# EAGLE board PNPHeadBoard (EAGLE 8.0.2)
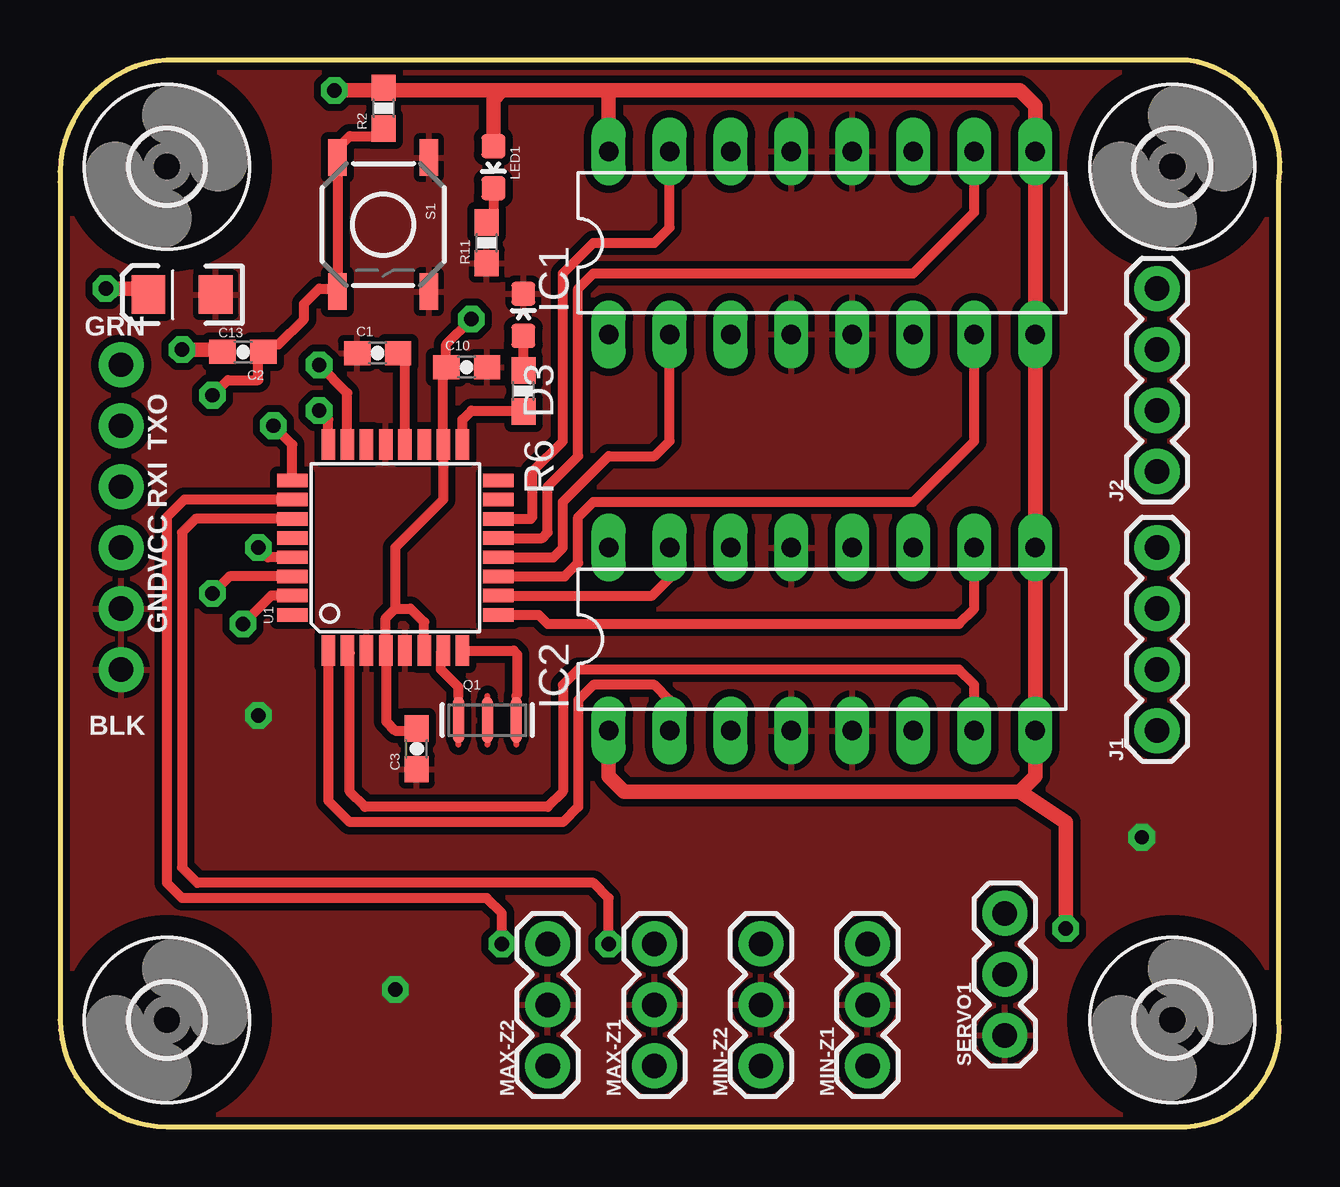
[diagram p0: board, top side]
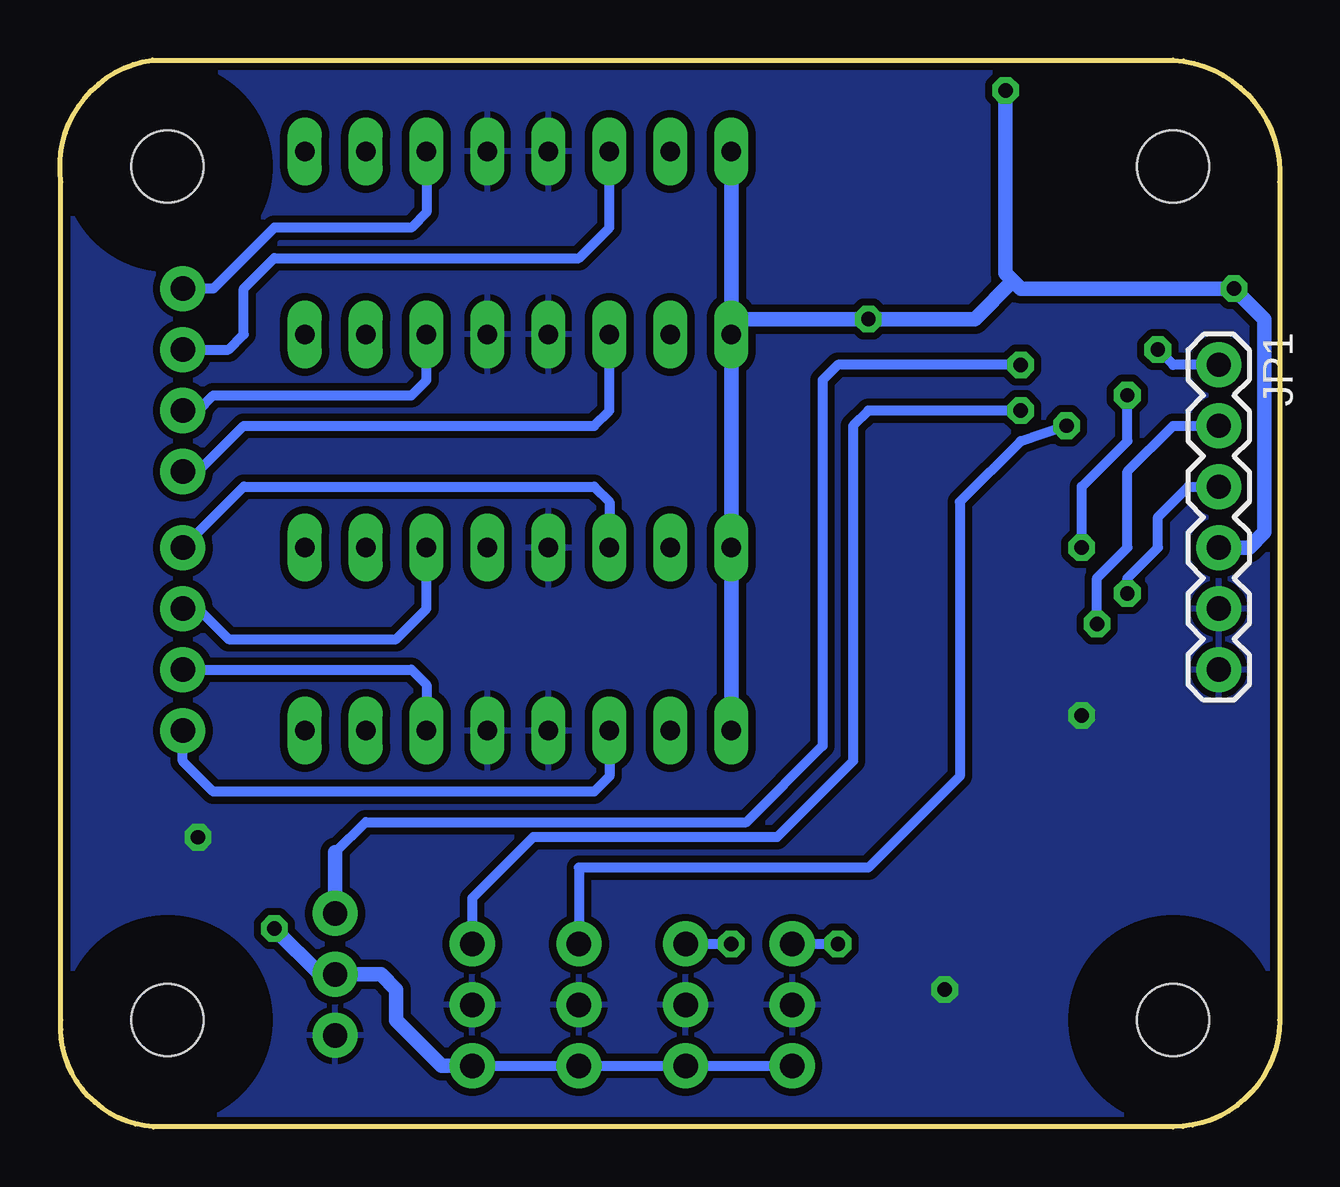
[diagram p1: board, bottom side, seen from below]

Size 50.85 x 44.45 mm. Coordinates in mm from the lower left corner, seen from the top.
Outline: 0.01,39.37 0.01,4.45 arc90 4.45,0 46.95,0 arc90 50.81,4.45 50.81,39.37 arc90 47,44.45 4.45,44.45 arc90 0.01,39.37
Copper layers (1*16): Top 0.035mm / dielectric 1.5mm / Bottom 0.035mm
Design rules "SparkFun-2-layer *": minimum track width 7mil, minimum drill 15mil, track to track 8mil, track to pad 8mil, pad to pad 8mil, via to via 8mil, smd to smd 8mil, copper to edge 8mil, drill to drill 8mil, minimum pad ring 12mil, minimum via ring 10mil, stop-mask expansion 4mil, vias tented up to drill 20mil, thermal gap 10mil
Net classes: 0 default: width 0.203 mm; 1 vcc: width 0.254 mm

## Footprints (pad centres in the part's own frame; a part is rotated, then mirrored left to right if it is on the bottom)
0603-CAP = smd 1.1 x 1: 1 -0.85,0; 2 0.85,0
EIA3216 = smd 1.4 x 1.6: A 1.4,0; C -1.4,0
0603-LED-ALT1 = smd 1 x 1: A 0,-0.877; C 0,0.877
DIL16 = drill 0.813 long: 1 -8.89,-3.81; 2 -6.35,-3.81; 3 -3.81,-3.81; 4 -1.27,-3.81; 5 1.27,-3.81; 6 3.81,-3.81; 7 6.35,-3.81; 8 8.89,-3.81; 9 8.89,3.81; 10 6.35,3.81; 11 3.81,3.81; 12 1.27,3.81; 13 -1.27,3.81; 14 -3.81,3.81; 15 -6.35,3.81; 16 -8.89,3.81
1X04 = drill 1.016 pad 1.88: 1 0,0; 2 2.54,0; 3 5.08,0; 4 7.62,0
1X06 = drill 1.016 pad 1.88: 1 0,0; 2 2.54,0; 3 5.08,0; 4 7.62,0; 5 10.16,0; 6 12.7,0
1X03 = drill 1.016 pad 1.88: 1 0,0; 2 2.54,0; 3 5.08,0
RESONATOR-SMD-1:1 = smd 0.45 x 1.905: 1 -1.2,0; 2 0,0; 3 1.2,0
0603-RES = smd 1.1 x 1: 1 -0.85,0; 2 0.85,0
TACTILE-SWITCH-SMD-ALT01 = smd 1.524 x 0.762: 1 -2.794,1.905; 2 2.794,1.905; 3 -2.794,-1.905; 4 2.794,-1.905
TQFP32-08 = smd 1.27 x 0.559: 1 -4.293,2.8; 2 -4.293,2; 3 -4.293,1.2; 4 -4.293,0.4; 5 -4.293,-0.4; 6 -4.293,-1.2; 7 -4.293,-2; 8 -4.293,-2.8; 17 4.293,-2.8; 18 4.293,-2; 19 4.293,-1.2; 20 4.293,-0.4; 21 4.293,0.4; 22 4.293,1.2; 23 4.293,2; 24 4.293,2.8 | smd 0.559 x 1.27: 9 -2.8,-4.293; 10 -2,-4.293; 11 -1.2,-4.293; 12 -0.4,-4.293; 13 0.4,-4.293; 14 1.2,-4.293; 15 2,-4.293; 16 2.8,-4.293; 25 2.8,4.293; 26 2,4.293; 27 1.2,4.293; 28 0.4,4.293; 29 -0.4,4.293; 30 -1.2,4.293; 31 -2,4.293; 32 -2.8,4.293
3,0 = hole 3: 0,0

## Placement (x,y rotation side)
C1  0.1uF  [0603-CAP]  13.24,32.23 0 top
C2  0.1uF  [0603-CAP]  7.63,32.28 180 top
C3  0.1uF  [0603-CAP]  14.87,15.75 90 top
C10  0.1uF  [0603-CAP]  16.95,31.65 0 top
C13  10uF  [EIA3216]  5.09,34.67 180 top
D3  Green  [0603-LED-ALT1]  19.31,33.83 0 top
IC1  L293D  [DIL16]  31.76,36.83 0 top
IC2  L293D  [DIL16]  31.76,20.32 0 top
J1  [1X04]  45.73,16.51 90 top
J2  [1X04]  45.73,27.3 90 top
JP1  FTDI Basic  [1X06]  2.55,31.75 270 bottom
LED1  Red  [0603-LED-ALT1]  18.07,39.98 180 top
MAX-Z1  [1X03]  24.77,2.54 90 top
MAX-Z2  [1X03]  20.33,2.54 90 top
MIN-Z1  [1X03]  33.66,2.54 90 top
MIN-Z2  [1X03]  29.22,2.54 90 top
Q1  8/16/20MHz  [RESONATOR-SMD-1:1]  17.81,16.94 0 top
R2  10K  [0603-RES]  13.5,42.44 90 top
R6  330  [0603-RES]  19.31,30.66 90 top
R11  10K  [0603-RES]  17.79,36.83 90 top
S1  Reset  [TACTILE-SWITCH-SMD-ALT01]  13.47,37.59 270 top
SERVO1  [1X03]  39.38,3.81 90 top
U1  ATMEGA328  [TQFP32-08]  13.98,24.13 90 top
U$1  [3,0]  46.36,40.01 0 top
U$2  [3,0]  4.45,40.01 0 top
U$4  [3,0]  4.45,4.45 0 top
U$5  [3,0]  46.36,4.45 0 top

## Library data of the parts
C1-C3 C10 C13 JP1 R2 R6 R11 U1 = SparkFun
D3 LED1 Q1 S1 = Testing
IC1 IC2 = st-microelectronics; MPN: L293D; OC_FARNELL: 9589619; OC_NEWARK: 56P8249
J1 J2 = SparkFun-Connectors; PROD_ID: CONN-09696
MAX-Z1 MAX-Z2 MIN-Z1 MIN-Z2 SERVO1 = SparkFun-Connectors
U$1 U$2 U$4 U$5 = holes

## Nets
A0: SERVO1.3 U1.23
A1: MIN-Z1.3 U1.24
A2: MIN-Z2.3 U1.25
A3: MAX-Z2.3 U1.26
A4: MAX-Z1.3 U1.27
A5: U1.28
A6: U1.19
A7: U1.22
AREF: C1.2 U1.20
D2: U1.32
D3: IC2.2 U1.1
D4: IC2.7 U1.2
D5: IC2.10 U1.9
D6: IC2.15 U1.10
D7: IC1.7 U1.11
D8: IC1.2 U1.12
D9: IC1.10 U1.13
D10: IC1.15 U1.14
DTR: C2.2 JP1.1
GND [vcc]: C1.1 C3.1 C10.2 C13.C D3.C IC1.4 IC1.5 IC1.12 IC1.13 IC2.4 IC2.5 IC2.13 JP1.5 JP1.6 MAX-Z1.2 MAX-Z2.2 MIN-Z1.2 MIN-Z2.2 Q1.2 R11.1 S1.1 S1.2 SERVO1.1 U1.3 U1.5 U1.21
MISO: U1.16
MOSI: U1.15
N$1: Q1.3 U1.8
N$2: Q1.1 U1.7
N$3: IC2.6 J1.2
N$4: LED1.C R11.2
N$5: IC2.11 J1.3
N$6: IC2.14 J1.4
N$7: D3.A R6.2
N$8: IC1.14 J2.3
N$9: IC2.3 J1.1
N$10: IC1.11 J2.4
N$11: IC1.6 J2.2
N$12: IC1.3 J2.1
N$21: IC2.12
RESET: C2.1 R2.1 S1.3 S1.4 U1.29
RXI: JP1.3 U1.30
SCK: R6.1 U1.17
TXO: JP1.2 U1.31
VCC: C3.2 C10.1 C13.A IC1.1 IC1.8 IC1.9 IC1.16 IC2.1 IC2.8 IC2.9 IC2.16 JP1.4 LED1.A MAX-Z1.1 MAX-Z2.1 MIN-Z1.1 MIN-Z2.1 R2.2 SERVO1.2 U1.4 U1.6 U1.18

## Tracks (layer width: path | path; a pad name or v marks a point on that pad's centre or on a via)
A0  (via drill 0.6)
  Top 0.406: U1.23 11.98,30.57 v10.8,31.75
  Bottom 0.406: v10.8,31.75 18.42,31.75 19.06,31.11 19.06,15.88 22.23,12.7 38.11,12.7 39.38,11.43
  Bottom 0.61: 39.38,11.43 SERVO1.3
A1  (via drill 0.6)
  Top 0.406: U1.24 11.18,29.47 v10.8,29.84
  Bottom 0.406: v10.8,29.84 17.15,29.84 17.79,29.21 17.79,15.24 20.96,12.06 31.12,12.06 33.66,9.53 MIN-Z1.3
A2  (via drill 0.6)
  Top 0.406: U1.25 9.69,28.42 v8.9,29.21
  Bottom 0.406: v8.9,29.21 10.8,28.57 13.34,26.04 13.34,14.61 17.15,10.79 29.22,10.79 MIN-Z2.3
A3  (via drill 0.6)
  Top 0.406: U1.26 5.18,26.13 4.45,25.4 4.45,10.16 5.09,9.53 17.79,9.53 18.42,8.89 v18.42,7.62
  Bottom 0.406: MAX-Z2.3 v18.42,7.62
A4  (via drill 0.6)
  Top 0.406: U1.27 5.65,25.33 5.09,24.77 5.09,10.79 5.72,10.16 22.23,10.16 22.87,9.53 v22.87,7.62
  Bottom 0.406: MAX-Z1.3 v22.87,7.62
AREF
  Top 0.406: U1.20 14.38,31.95 C1.2
D3
  Top 0.406: IC2.2 25.41,17.78 24.77,18.41 22.23,18.41 21.6,17.78 21.6,13.34 20.96,12.7 12.07,12.7 11.18,13.6 U1.1
D4
  Top 0.406: IC2.7 38.11,18.41 37.47,19.05 21.6,19.05 20.96,18.41 20.96,13.97 20.33,13.34 12.71,13.34 12.07,13.97 12.07,19.74 U1.2
D5
  Top 0.406: U1.9 19.95,21.33 20.33,20.95 37.47,20.95 38.11,21.59 IC2.10
D6
  Top 0.406: IC2.15 25.41,22.86 24.68,22.13 U1.10
D7
  Top 0.406: U1.11 21.03,22.93 21.6,23.5 21.6,25.4 22.23,26.04 35.57,26.04 38.11,28.57 IC1.7
D8
  Top 0.406: U1.12 20.56,23.73 20.96,24.13 20.96,26.04 22.87,27.94 24.77,27.94 25.41,28.57 IC1.2
D9
  Top 0.406: U1.13 20.09,24.53 20.33,24.77 20.33,26.67 21.6,27.94 21.6,34.92 22.23,35.56 35.57,35.56 38.11,38.1 IC1.10
D10
  Top 0.406: U1.14 19.62,25.33 19.69,25.4 19.69,27.3 20.96,28.57 20.96,35.56 22.23,36.83 24.77,36.83 25.41,37.47 IC1.15
DTR  (via drill 0.6)
  Top 0.61: v5.09,32.38 6.68,32.38 C2.2
  Bottom 0.406: JP1.1 4.45,31.75 v5.09,32.38
GND  (via drill 0.6)
  other vias: 8.26,17.14 45.09,12.06 13.98,5.71
  pour Top (isolate 0.305): 0.01,44.45 50.81,44.45 50.81,0 0.01,0
  pour Bottom (isolate 0.305): 0.01,44.45 50.81,44.45 50.81,0 0.01,0
N$1
  Top 0.406: U1.8 18.91,19.84 19.06,19.68 19.06,18 19.01,17.96
N$2
  Top 0.406: 16.61,17.96 16.61,18.32 15.88,19.05 15.88,19.74 U1.7
N$3
  Bottom 0.406: J1.2 36.2,19.05 35.57,18.41 IC2.6
N$4
  Top 0.406: LED1.C 18.07,37.96 R11.2
N$5
  Bottom 0.406: J1.3 45.09,21.59 43.82,20.32 36.84,20.32 35.57,21.59 IC2.11
N$6
  Bottom 0.406: J1.4 43.19,26.67 28.58,26.67 27.95,26.04 IC2.14
N$7
  Top 0.406: R6.2 D3.A
N$8
  Bottom 0.406: J2.3 43.82,32.38 43.19,33.02 43.19,34.92 41.92,36.2 29.22,36.2 27.95,37.47 IC1.14
N$9
  Bottom 0.406: IC2.3 27.95,14.61 28.58,13.97 44.46,13.97 45.73,15.24 J1.1
N$10
  Bottom 0.406: J2.4 44.46,34.92 41.92,37.47 36.2,37.47 35.57,38.1 IC1.11
N$11
  Bottom 0.406: J2.2 45.09,29.84 44.46,30.48 36.2,30.48 35.57,31.11 IC1.6
N$12
  Bottom 0.406: J2.1 45.09,27.3 43.19,29.21 28.58,29.21 27.95,29.84 IC1.3
RESET  (via drill 0.6)
  Top 0.406: U1.29 8.66,23.73 v8.26,24.13 | v6.36,30.48 6.99,31.11 8.26,31.11 8.26,32.07 C2.1 8.48,32.6 9.11,32.6 10.17,33.66 10.17,34.29 10.8,34.92 11.44,34.92 S1.4 S1.3 | 11.57,40.73 11.57,40.77 12.07,41.27 13.18,41.27 R2.1
  Top 0.61: S1.3 11.57,40.73
  Bottom 0.406: v8.26,24.13 8.26,26.67 6.36,28.57 v6.36,30.48
RXI  (via drill 0.6)
  Top 0.406: U1.30 7.06,22.93 v6.36,22.23
  Bottom 0.406: v6.36,22.23 6.36,22.86 5.09,24.13 5.09,25.4 3.82,26.67 JP1.3
SCK
  Top 0.406: U1.17 16.78,29.47 17.15,29.84 19.28,29.84 R6.1
TXO  (via drill 0.6)
  Top 0.406: U1.31 8.8,22.13 v7.63,20.95
  Bottom 0.406: v7.63,20.95 7.63,22.86 6.36,24.13 6.36,27.3 4.45,29.21 JP1.2
VCC  (via drill 0.6)
  Top 0.406: C3.2 14.78,16.51 13.98,16.51 13.6,16.89 13.6,19.82 U1.4 13.58,21.19 13.98,21.59 | U1.6 15.18,21.02 14.61,21.59 13.98,21.59 | 13.98,21.59 13.98,24.13 15.98,26.13 U1.18 15.98,31.53 C10.1 16.1,32.6 v17.15,33.66
  Top 0.61: v1.91,34.92 3.43,34.92 C13.A | 18.42,43.18 13.61,43.18 R2.2 | 18.42,43.18 22.87,43.18 | 22.87,43.18 40.01,43.18 40.65,42.55 IC1.9 IC1.8 IC2.9 IC2.8 40.65,14.61 40.01,13.97 | LED1.A 18.07,42.82 18.42,43.18 | IC2.1 22.87,14.61 23.5,13.97 40.01,13.97 | IC1.16 22.87,43.18 | 13.34,43.18 v11.44,43.18 | v41.92,8.26 41.92,12.7 40.01,13.97
  Bottom 0.406: MIN-Z1.1 MIN-Z2.1 MAX-Z1.1 MAX-Z2.1
  Bottom 0.61: JP1.4 1.28,24.13 0.64,24.77 0.64,33.66 v1.91,34.92 10.8,34.92 11.12,35.24 | v11.44,43.18 11.44,35.56 11.12,35.24 | IC2.1 IC2.16 IC1.1 22.87,33.66 | IC1.16 22.87,33.66 | 11.12,35.24 12.71,33.66 v17.15,33.66 22.87,33.66 | MIN-Z1.1 34.93,2.54 36.84,4.45 36.84,5.71 37.47,6.35 SERVO1.2 40.01,6.35 v41.92,8.26

## Text on the board
tPlace: GRN | TXO | RXI | VCC | GND | BLK